# EAGLE board Player_v0.3_simplified (EAGLE 6.2)
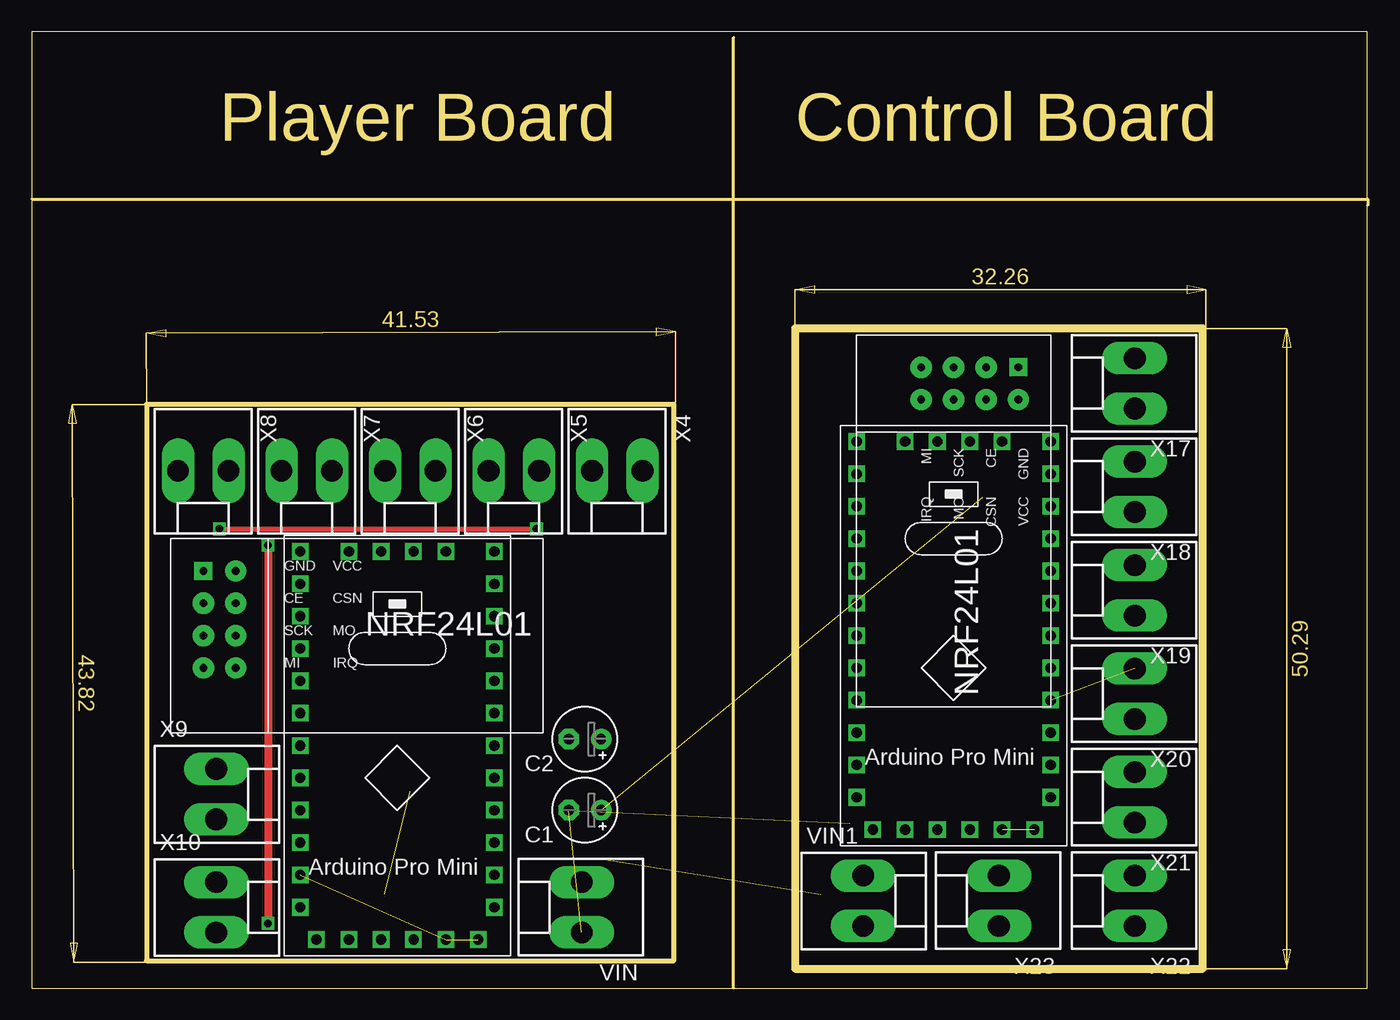
[diagram p0: board, top side]
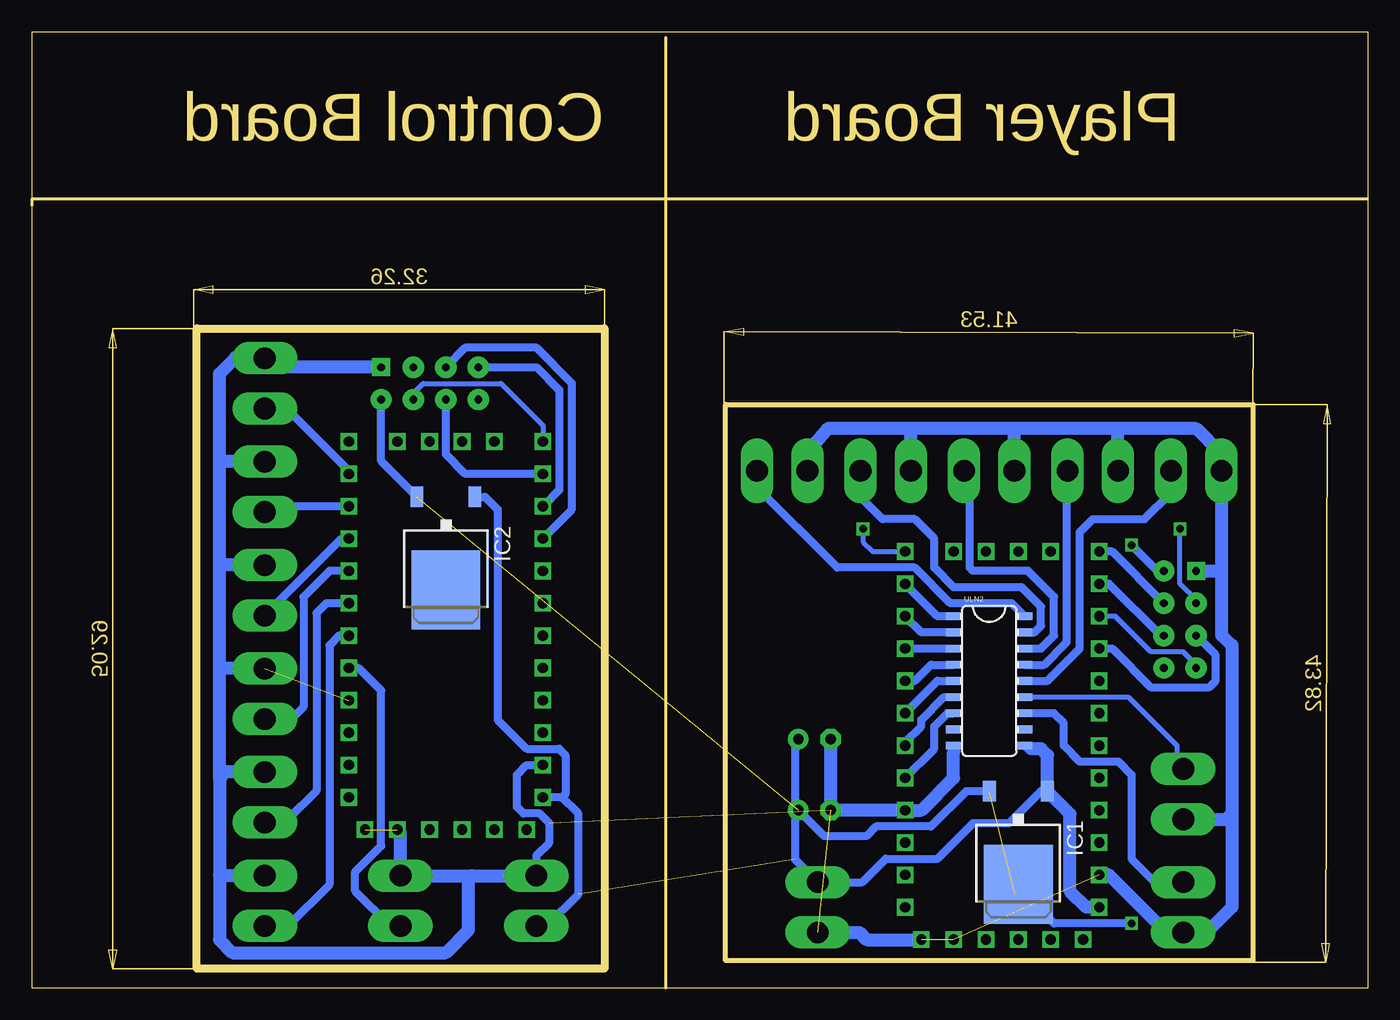
[diagram p1: board, bottom side, seen from below]

Size 104.9 x 75.11 mm. Coordinates in mm from the lower left corner, seen from the top.
Outline: 55.12,0 0,0 0,61.98
Outline: 55.12,0 104.88,0 104.88,75.11 0,75.11 0,61.98
Outline: 55.12,0 55.12,74.68
Outline: 0,61.98 104.9,61.98 104.9,61.47
Outline: 9.02,45.85 9.02,2.16 50.42,2.16 50.42,45.85 9.02,45.85
Outline: 59.94,1.52 91.95,1.52 91.95,51.82 59.94,51.82 59.94,1.52
Copper layers (1*16): Top 0.035mm / dielectric 1.5mm / Bottom 0.035mm
Design rules: minimum track width 10mil, minimum drill 24mil, track to track 8mil, track to pad 8mil, pad to pad 8mil, via to via 8mil, smd to smd 8mil, copper to edge 40mil, drill to drill 8mil, minimum pad ring 10mil, minimum via ring 8mil, stop-mask expansion 4mil, vias tented up to drill 0mil, thermal gap 10mil

## Footprints (pad centres in the part's own frame; a part is rotated, then mirrored left to right if it is on the bottom)
E2,5-5 = drill 0.813 pad 1.6: + -1.27,0 | drill 0.813 pad 1.6 octagon: - 1.27,0
TO252 = smd 1 x 1.6: 1 -2.28,-4.8; 2 2.28,-4.8 | smd 5.4 x 6.2: 3 0,2.5
LED5MM = drill 0.813 pad 1.676 octagon: A -1.27,0; K 1.27,0
TACTILE-PTH = drill 1.016 pad 1.88: 1 -3.251,2.261; 2 3.251,2.261; 3 -3.251,-2.261; 4 3.251,-2.261
F/DB18 = drill 1.016 pad 2.54 octagon: + 7.01,0; - -7.01,0 | hole 3.607: 17.018,0; -17.018,0
ARDUINO_PRO_MINI = drill 0.8 square: A0 15.24,-20.32; A1 15.24,-17.78; A2 15.24,-15.24; A3 15.24,-12.7; A4 3.81,-30.48; A5 6.35,-30.48; A6 8.89,-30.48; A7 11.43,-30.48; D2 0,-12.7; D3 0,-15.24; D4 0,-17.78; D5 0,-20.32; D6 0,-22.86; D7 0,-25.4; D8 0,-27.94; D9 0,-30.48; D10 15.24,-30.48; D11 15.24,-27.94; D12 15.24,-25.4; D13 15.24,-22.86; DTR 13.97,0; GND 0,-10.16; GND1 15.24,-5.08; GND2 1.27,0; GND3 3.81,0; RAW 15.24,-2.54; RESET 0,-7.62; RESET1 15.24,-7.62; RXI 0,-5.08; RXI1 8.89,0; TXO 0,-2.54; TXO1 11.43,0; VCC 15.24,-10.16; VCC1 6.35,0
NRF24L01_8PIN = drill 0.6 pad 1.676: CE 2.54,10.16; CSN 5.08,10.16; IRQ 5.08,5.08; MI 2.54,5.08; MO 5.08,7.62; SCK 2.54,7.62; VCC 5.08,12.7 | drill 0.6 pad 1.422 square: GND 2.54,12.7
SO018 = smd 0.6 x 1.2: 1 -5.08,-2.8; 2 -3.81,-2.8; 3 -2.54,-2.8; 4 -1.27,-2.8; 5 0,-2.8; 6 1.27,-2.8; 7 2.54,-2.8; 8 3.81,-2.8; 9 5.08,-2.8; 10 5.08,2.8; 11 3.81,2.8; 12 2.54,2.8; 13 1.27,2.8; 14 0,2.8; 15 -1.27,2.8; 16 -2.54,2.8; 17 -3.81,2.8; 18 -5.08,2.8
KK-156-2 = drill 1.7 pad 2.184 long: 1 -1.98,0; 2 1.98,0

## Placement (x,y rotation side)
C1  [E2,5-5]  43.43,13.97 180 top
C2  [E2,5-5]  43.43,19.56 180 top
IC1  7805DT  [TO252]  27.43,10.67 180 bottom
IC2  7805DT  [TO252]  72.39,33.78 180 bottom
LED1  [LED5MM]  -58.42,-105.41 0 top  (outside the outline)
LED2  [LED5MM]  -88.9,-115.57 0 top  (outside the outline)
LED3  [LED5MM]  -77.22,-115.57 0 top  (outside the outline)
LED4  [LED5MM]  -65.53,-115.57 0 top  (outside the outline)
LED5  [LED5MM]  -53.85,-115.57 0 top  (outside the outline)
LED6  [LED5MM]  -88.9,-122.17 0 top  (outside the outline)
S1  SWITCH-MOMENTARY-2PTH  [TACTILE-PTH]  -77.72,-151.38 0 top  (outside the outline)
S2  SWITCH-MOMENTARY-2PTH  [TACTILE-PTH]  -69.09,-151.38 0 top  (outside the outline)
S3  SWITCH-MOMENTARY-2PTH  [TACTILE-PTH]  -88.14,-161.54 0 top  (outside the outline)
S4  SWITCH-MOMENTARY-2PTH  [TACTILE-PTH]  -79.5,-161.54 0 top  (outside the outline)
S5  SWITCH-MOMENTARY-2PTH  [TACTILE-PTH]  -70.87,-161.54 0 top  (outside the outline)
S6  SWITCH-MOMENTARY-2PTH  [TACTILE-PTH]  -62.23,-161.54 0 top  (outside the outline)
S7  SWITCH-MOMENTARY-2PTH  [TACTILE-PTH]  -88.14,-170.43 0 top  (outside the outline)
SG1  F/DB18  [F/DB18]  -71.12,-77.72 0 top  (outside the outline)
U$1  ARDUINO_PRO_MINI  [ARDUINO_PRO_MINI]  36.32,3.81 180 top
U$2  NRF24L01_8PIN  [NRF24L01_8PIN]  64.77,51.31 270 top
U$3  ARDUINO_PRO_MINI  [ARDUINO_PRO_MINI]  80.01,12.45 180 top
U$5  NRF24L01_8PIN  [NRF24L01_8PIN]  10.92,20.07 0 top
ULN2  [SO018]  29.72,24.13 270 bottom
VIN  [KK-156-2]  43.18,6.35 90 top
VIN1  [KK-156-2]  65.28,6.86 270 top
X3  [KK-156-2]  -86.11,-97.03 0 top  (outside the outline)
X4  [KK-156-2]  45.97,40.64 180 top
X5  [KK-156-2]  37.85,40.64 180 top
X6  [KK-156-2]  29.72,40.64 180 top
X7  [KK-156-2]  21.59,40.64 180 top
X8  [KK-156-2]  13.46,40.64 180 top
X9  [KK-156-2]  14.48,15.24 270 top
X10  [KK-156-2]  14.48,6.35 270 top
X11  [KK-156-2]  -75.95,-97.03 0 top  (outside the outline)
X12  [KK-156-2]  -65.79,-97.03 0 top  (outside the outline)
X13  [KK-156-2]  -55.63,-97.03 0 top  (outside the outline)
X14  [KK-156-2]  -86.11,-107.19 0 top  (outside the outline)
X15  [KK-156-2]  -75.95,-107.19 0 top  (outside the outline)
X16  [KK-156-2]  -65.79,-107.19 0 top  (outside the outline)
X17  [KK-156-2]  86.61,47.5 90 top
X18  [KK-156-2]  86.61,39.37 90 top
X19  [KK-156-2]  86.61,31.24 90 top
X20  [KK-156-2]  86.61,23.11 90 top
X21  [KK-156-2]  86.61,14.99 90 top
X22  [KK-156-2]  86.61,6.86 90 top
X23  [KK-156-2]  75.95,6.86 90 top
X24  [KK-156-2]  -86.11,-130.56 0 top  (outside the outline)
X25  [KK-156-2]  -75.95,-130.56 0 top  (outside the outline)
X26  [KK-156-2]  -65.79,-130.56 0 top  (outside the outline)
X27  [KK-156-2]  -86.11,-140.72 0 top  (outside the outline)
X28  [KK-156-2]  -75.95,-140.72 0 top  (outside the outline)
X31  [KK-156-2]  -65.79,-140.72 0 top  (outside the outline)
X32  [KK-156-2]  -86.11,-150.88 0 top  (outside the outline)

## Library data of the parts
C1 C2 = rcl
IC1 IC2 = linear
LED1-LED6 = adafruit
S1-S7 = SparkFun-Electromechanical
SG1 = buzzer; OC_FARNELL: unknown; OC_NEWARK: unknown
U$1 U$3 = MimaZ
U$2 U$5 = nrf24l01_DealExtreme
ULN2 = SparkFun-PowerIC
VIN VIN1 X3-X28 X31 X32 = con-molex; OC_FARNELL: unknown; OC_NEWARK: unknown

## Nets
+3V3: C1.+ IC1.2 IC2.2 U$2.VCC U$5.VCC
+12V: C2.+ IC1.1 IC2.1 U$1.RAW U$3.RAW ULN2.10 VIN1.2 VIN.2
GND: C1.- C2.- U$1.GND U$1.GND1 U$1.GND2 U$1.GND3 U$2.GND U$3.GND U$3.GND1 U$3.GND2 U$3.GND3 U$5.GND ULN2.9 VIN1.1 VIN.1 X4.2 X5.2 X6.2 X7.2 X8.2 X9.2 X10.2 X17.2 X18.2 X19.2 X20.2 X21.2 X22.2 X23.2
N$1: U$1.D7 ULN2.2
N$2: U$1.D3 ULN2.6
N$3: U$1.D5 ULN2.4
N$4: U$1.D6 ULN2.3
N$5: ULN2.18 X4.1
N$6: ULN2.17 X5.1
N$7: ULN2.16 X6.1
N$8: ULN2.15 X7.1
N$9: U$1.D12 U$5.MI
N$10: U$1.D11 U$5.MO
N$11: U$1.D13 U$5.SCK
N$12: U$1.D10 U$5.CSN
N$13: ULN2.14 X8.1
N$14: ULN2.13 X9.1
N$15: ULN2.12 X10.1
N$16: LED1.A X3.1
N$17: U$2.MI U$3.D12
N$18: U$1.D9 U$5.CE
N$19: U$2.MO U$3.D11
N$20: U$2.SCK U$3.D13
N$21: U$1.D2 ULN2.7
N$23: U$2.CSN U$3.D10
N$24: U$2.CE
N$25: LED1.K X3.2
N$26: LED2.A X12.1
N$27: LED2.K X12.2
N$28: U$1.D8 ULN2.1
N$29: LED3.A X13.1
N$30: LED3.K X13.2
N$31: LED4.A X14.1
N$32: U$1.D4 ULN2.5
N$34: LED4.K X14.2
N$35: LED5.A X15.1
N$36: LED5.K X15.2
N$37: LED6.A X16.1
N$38: LED6.K X16.2
N$39: U$3.D5 X20.1
N$40: U$3.D6 X19.1
N$41: U$3.D8 X17.1
N$42: U$3.D3 X22.1
N$43: U$3.D4 X21.1
N$44: U$3.D7 X18.1
N$45: U$3.D9
N$46: U$3.D2 X23.1
N$47: SG1.+ X11.1
N$48: SG1.- X11.2
N$49: S1.3 X24.1
N$50: S2.3 X26.1
N$51: S3.3 X27.1
N$52: S4.3 X28.1
N$53: S5.3 X31.1
N$55: S6.3 X32.1
N$57: S7.3 X25.1
N$59: S7.1 X25.2
N$61: S6.1 X32.2
N$63: S5.1 X31.2
N$65: S4.1 X28.2
N$73: S3.1 X27.2
N$74: S2.1 X26.2
N$75: S1.1 X24.2

## Tracks (layer width: path | path; a pad name or v marks a point on that pad's centre or on a via)
+3V3  (via drill 0.6)  (2 unrouted)
  Top 0.61: v18.54,34.8 v18.54,5.08
  Bottom 0.61: IC1.2 31.52,15.47 34.29,12.7 38.61,12.7 39.37,11.94 42.67,11.94 C1.+ | U$5.VCC 16.51,32.77 v18.54,34.8 | v18.54,5.08 24.64,5.08 26.42,6.86 26.42,7.37 27.69,7.37 | IC2.2 74.67,38.6 77.47,41.4 U$2.VCC
+12V  (1 unrouted)
  Bottom 0.61: 26.42,18.8 26.66,18.8 ULN2.10 | IC1.1 25.68,15.47 28.19,12.95 30.99,12.95 33.78,10.16 37.85,10.16 39.68,8.33 VIN.2 44.96,10.11 44.96,19.3 C2.+ | VIN1.2 64.46,4.88 61.98,7.37 61.98,13.72 63.25,14.99 | 63.25,14.99 U$3.RAW | IC2.1 69.32,38.58 68.33,37.59 68.33,21.08 66.04,18.8 63.5,18.8 62.99,18.29 62.99,15.24 63.25,14.99
  Bottom 1.016: 26.42,18.8 25.65,18.8 25.15,18.29 IC1.1 23.37,13.68 23.37,7.62 22.1,6.35 U$1.RAW
GND  (6 unrouted)
  Bottom 0.61: 32.51,18.54 ULN2.9 | VIN1.1 65.28,10.41 64.26,11.43 64.26,12.95 65.02,13.72 66.29,13.72 66.8,14.22 66.8,16.76 66.04,17.53 U$3.GND1
  Bottom 1.016: 19.81,43.94 13.46,43.94 11.48,41.96 X8.2 11.48,32.77 | 19.81,43.94 27.94,43.94 | 27.94,43.94 36.07,43.94 | 36.07,43.94 42.42,43.94 43.94,42.16 43.94,40.69 X4.2 | VIN.1 39.93,4.37 39.37,3.81 U$1.GND2 | 32.51,18.54 32.51,16.51 35.05,13.97 U$1.GND C1.- C2.- | X7.2 19.61,43.74 19.81,43.94 | X6.2 27.74,43.74 27.94,43.94 | X5.2 35.87,43.74 36.07,43.94 | U$1.GND1 20.32,8.89 15.8,4.37 X10.2 12.65,4.37 10.67,6.35 10.67,13.72 | 11.48,32.77 11.48,27.74 10.67,26.92 10.67,13.72 | X9.2 11.12,13.26 10.67,13.72 | U$5.GND 11.48,32.77 | U$3.GND3 75.95,12.19 X23.2 70.36,8.84 | 90.17,16.51 90.17,24.89 | 90.17,24.89 90.17,33.53 | 90.17,33.53 90.17,41.4 | 90.17,41.4 90.17,48.26 88.9,49.53 86.67,49.53 X17.2 85.9,48.77 U$2.GND | X18.2 90.12,41.35 90.17,41.4 | X19.2 89.86,33.22 90.17,33.53 | X20.2 89.97,25.09 90.17,24.89 | X21.2 89.71,16.97 90.17,16.51 | 70.36,8.84 VIN1.1 | 90.17,16.51 90.17,8.89 | 90.17,8.89 90.17,3.81 89.15,2.79 72.39,2.79 70.61,4.57 70.61,8.58 70.36,8.84 | X22.2 90.12,8.84 90.17,8.89
N$1
  Bottom 0.61: ULN2.2 35.05,27.94 U$1.D7
N$2
  Bottom 0.61: U$1.D3 36.32,19.3 35.05,20.57 35.05,21.08 33.27,22.86 ULN2.6
N$3
  Bottom 0.61: U$1.D5 35.56,24.13 34.29,25.4 ULN2.4
N$4
  Bottom 0.61: U$1.D6 ULN2.3
N$5
  Bottom 0.61: ULN2.18 27.94,30.23 32.77,30.23 35.56,33.02 41.66,33.02 48.01,39.37 48.01,40.59 X4.1
N$6
  Bottom 0.61: ULN2.17 26.16,27.94 25.65,28.45 25.65,29.97 27.18,31.5 32.51,31.5 34.04,33.02 34.04,35.31 35.56,36.83 38.1,36.83 39.88,38.61 39.88,40.59 X5.1
N$7
  Bottom 0.61: X6.1 31.24,40.18 31.24,33.02 30.99,32.77 26.67,32.77 24.64,30.73 24.64,27.69 25.65,26.67 ULN2.16
N$8
  Bottom 0.61: ULN2.15 25.4,25.4 23.62,27.18 23.62,40.59 X7.1
N$9
  Bottom 0.406: U$1.D12 19.81,29.21 17.02,26.42 14.48,26.42 13.46,25.4 U$5.MI
N$10
  Bottom 0.61: U$5.MO 16.26,27.69 20.32,31.75 U$1.D11
N$11
  Bottom 0.61: U$1.D13 20.07,26.67 17.02,23.62 12.45,23.62 11.94,24.13 11.94,26.16 U$5.SCK
N$12
  Bottom 0.61: U$5.CSN 20.07,34.29 U$1.D10
N$13
  Bottom 0.61: ULN2.14 25.15,24.13 22.61,26.67 22.61,35.81 21.59,36.83 17.53,36.83 15.49,38.86 15.49,40.59 X8.1
N$14
  Bottom 0.406: ULN2.13 18.8,22.86 14.99,19.05 14.99,17.73 X9.1
N$15
  Bottom 0.61: ULN2.12 24.64,21.59 23.88,20.83 23.88,19.05 22.61,17.78 19.56,17.78 18.54,16.76 18.54,10.16 16.51,8.13 14.68,8.13 X10.1
N$16  (1 unrouted)
N$17
  Bottom 0.61: U$2.MI 65.28,48.77 63.5,46.99 63.5,39.12 U$3.D12
N$18  (via drill 0.6)
  Top 0.406: v14.73,36.07 v39.62,36.07
  Bottom 0.406: U$5.CE 13.46,30.48 14.73,31.75 v14.73,36.07 | v39.62,36.07 39.62,35.05 38.86,34.29 U$1.D9
N$19
  Bottom 0.61: U$3.D11 70.87,40.39 72.39,41.91 U$2.MO
N$20
  Bottom 0.61: U$3.D13 62.48,37.59 62.48,47.5 65.28,50.29 70.87,50.29 U$2.SCK
N$21
  Bottom 0.61: U$1.D2 34.04,18.8 34.04,20.57 33.02,21.59 ULN2.7
N$23
  Bottom 0.406: U$2.CSN 74.93,46.74 74.17,47.5 68.07,47.5 64.77,44.2 U$3.D10
N$25  (1 unrouted)
N$26  (1 unrouted)
N$27  (1 unrouted)
N$28
  Bottom 0.61: ULN2.1 33.78,29.21 U$1.D8
N$29  (1 unrouted)
N$30  (1 unrouted)
N$31  (1 unrouted)
N$32
  Bottom 0.61: U$1.D4 33.78,24.13 ULN2.5
N$34  (1 unrouted)
N$35  (1 unrouted)
N$36  (1 unrouted)
N$37  (1 unrouted)
N$38  (1 unrouted)
N$39
  Bottom 0.61: U$3.D5 81.53,32.77 83.57,30.73 83.57,22.1 84.58,21.08 86.56,21.08 X20.1
N$40
  Bottom 0.61: U$3.D6 80.57,35.31 X19.1
N$41
  Bottom 0.61: U$3.D8 80.01,40.64 85.09,45.72 86.41,45.72 X17.1
N$42
  Bottom 0.61: U$3.D3 80.77,27.69 81.53,26.92 81.53,8.13 84.84,4.83 86.56,4.83 X22.1
N$43
  Bottom 0.61: U$3.D4 81.79,30.23 82.55,29.46 82.55,15.49 84.84,13.21 86.41,13.21 X21.1
N$44
  Bottom 0.61: U$3.D7 86.16,37.85 X18.1
N$46
  Bottom 0.61: X23.1 76.76,4.88 79.5,7.62 79.5,9.14 77.47,11.18 77.47,23.37 79.25,25.15 U$3.D2
N$47  (1 unrouted)
N$48  (1 unrouted)
N$49  (1 unrouted)
N$50  (1 unrouted)
N$51  (1 unrouted)
N$52  (1 unrouted)
N$53  (1 unrouted)
N$55  (1 unrouted)
N$57  (1 unrouted)
N$59  (1 unrouted)
N$61  (1 unrouted)
N$63  (1 unrouted)
N$65  (1 unrouted)
N$73  (1 unrouted)
N$74  (1 unrouted)
N$75  (1 unrouted)

## Text on the board
Dimension: Player Board | Control Board